# Altium PCB PCB1.PcbDoc
Units mm, origin at the board's own origin, x right, y up, seen from the top; angles counter-clockwise.
Board outline 35 x 35 mm, 4 copper layers (L1(SIGNAL), L2(GND), L3(GND), L4(SIGNAL)), stack 1.569 mm thick; 35 components, 27 nets, 172 pads, 119 vias.
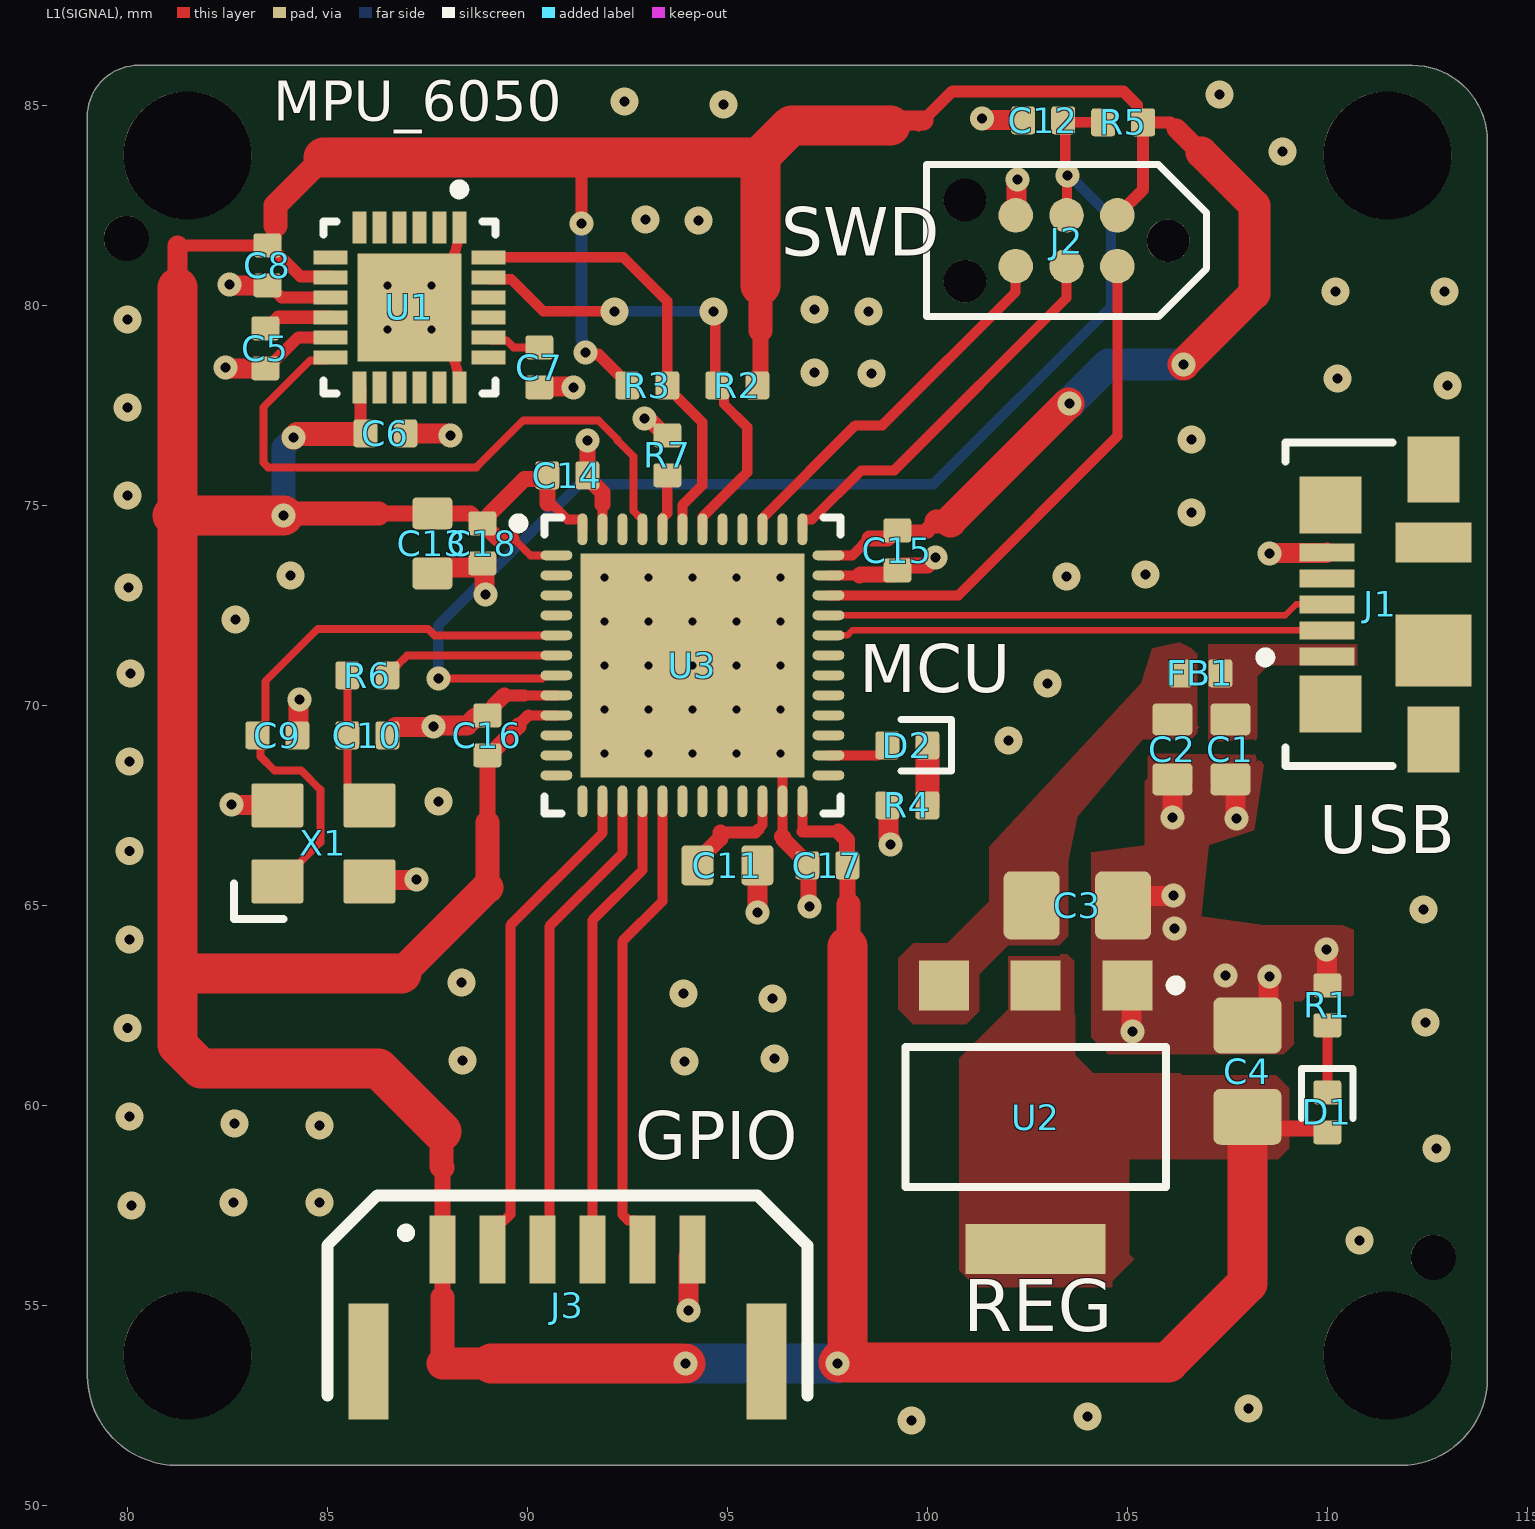
[diagram p0: L1(SIGNAL) view]
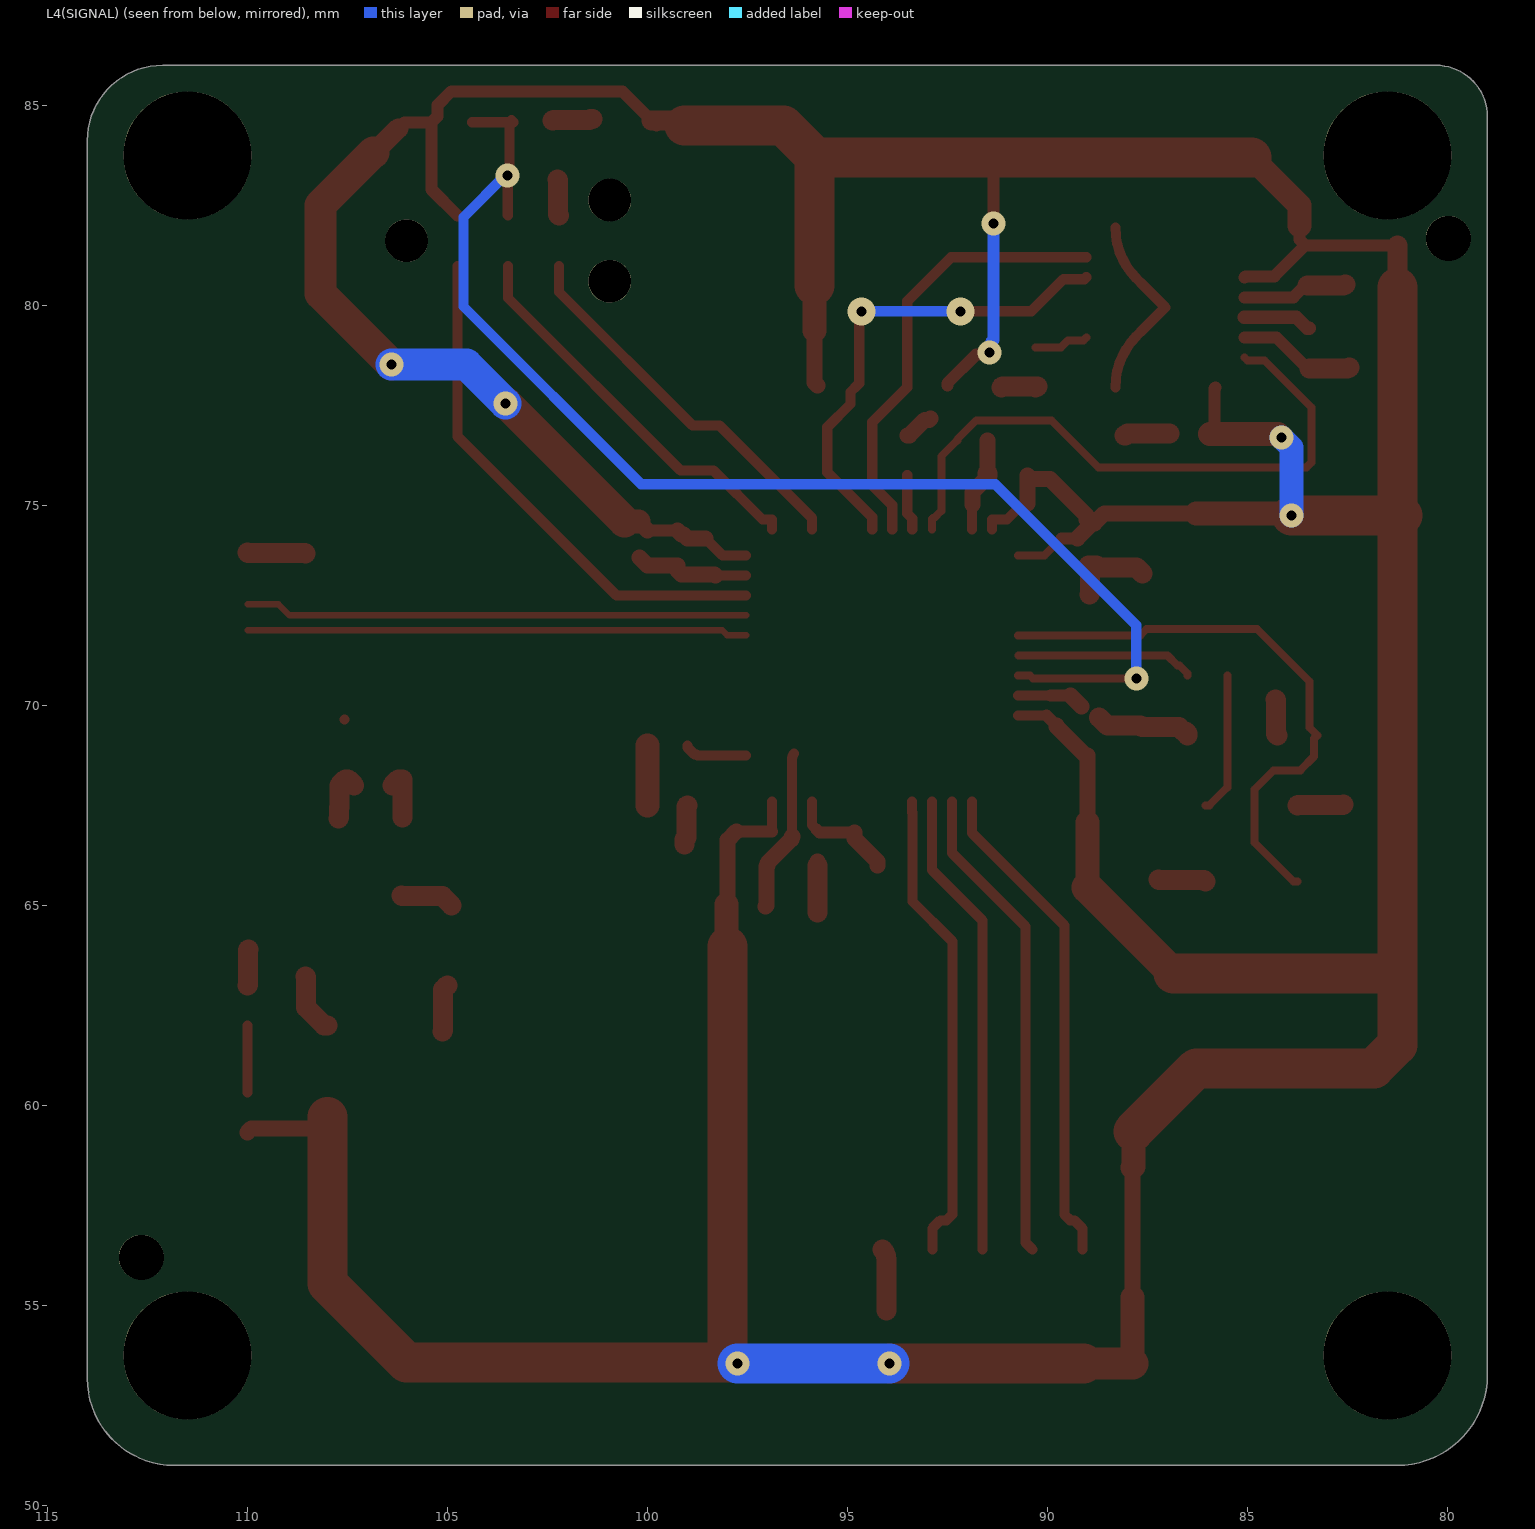
[diagram p1: L4(SIGNAL) view, seen from below]
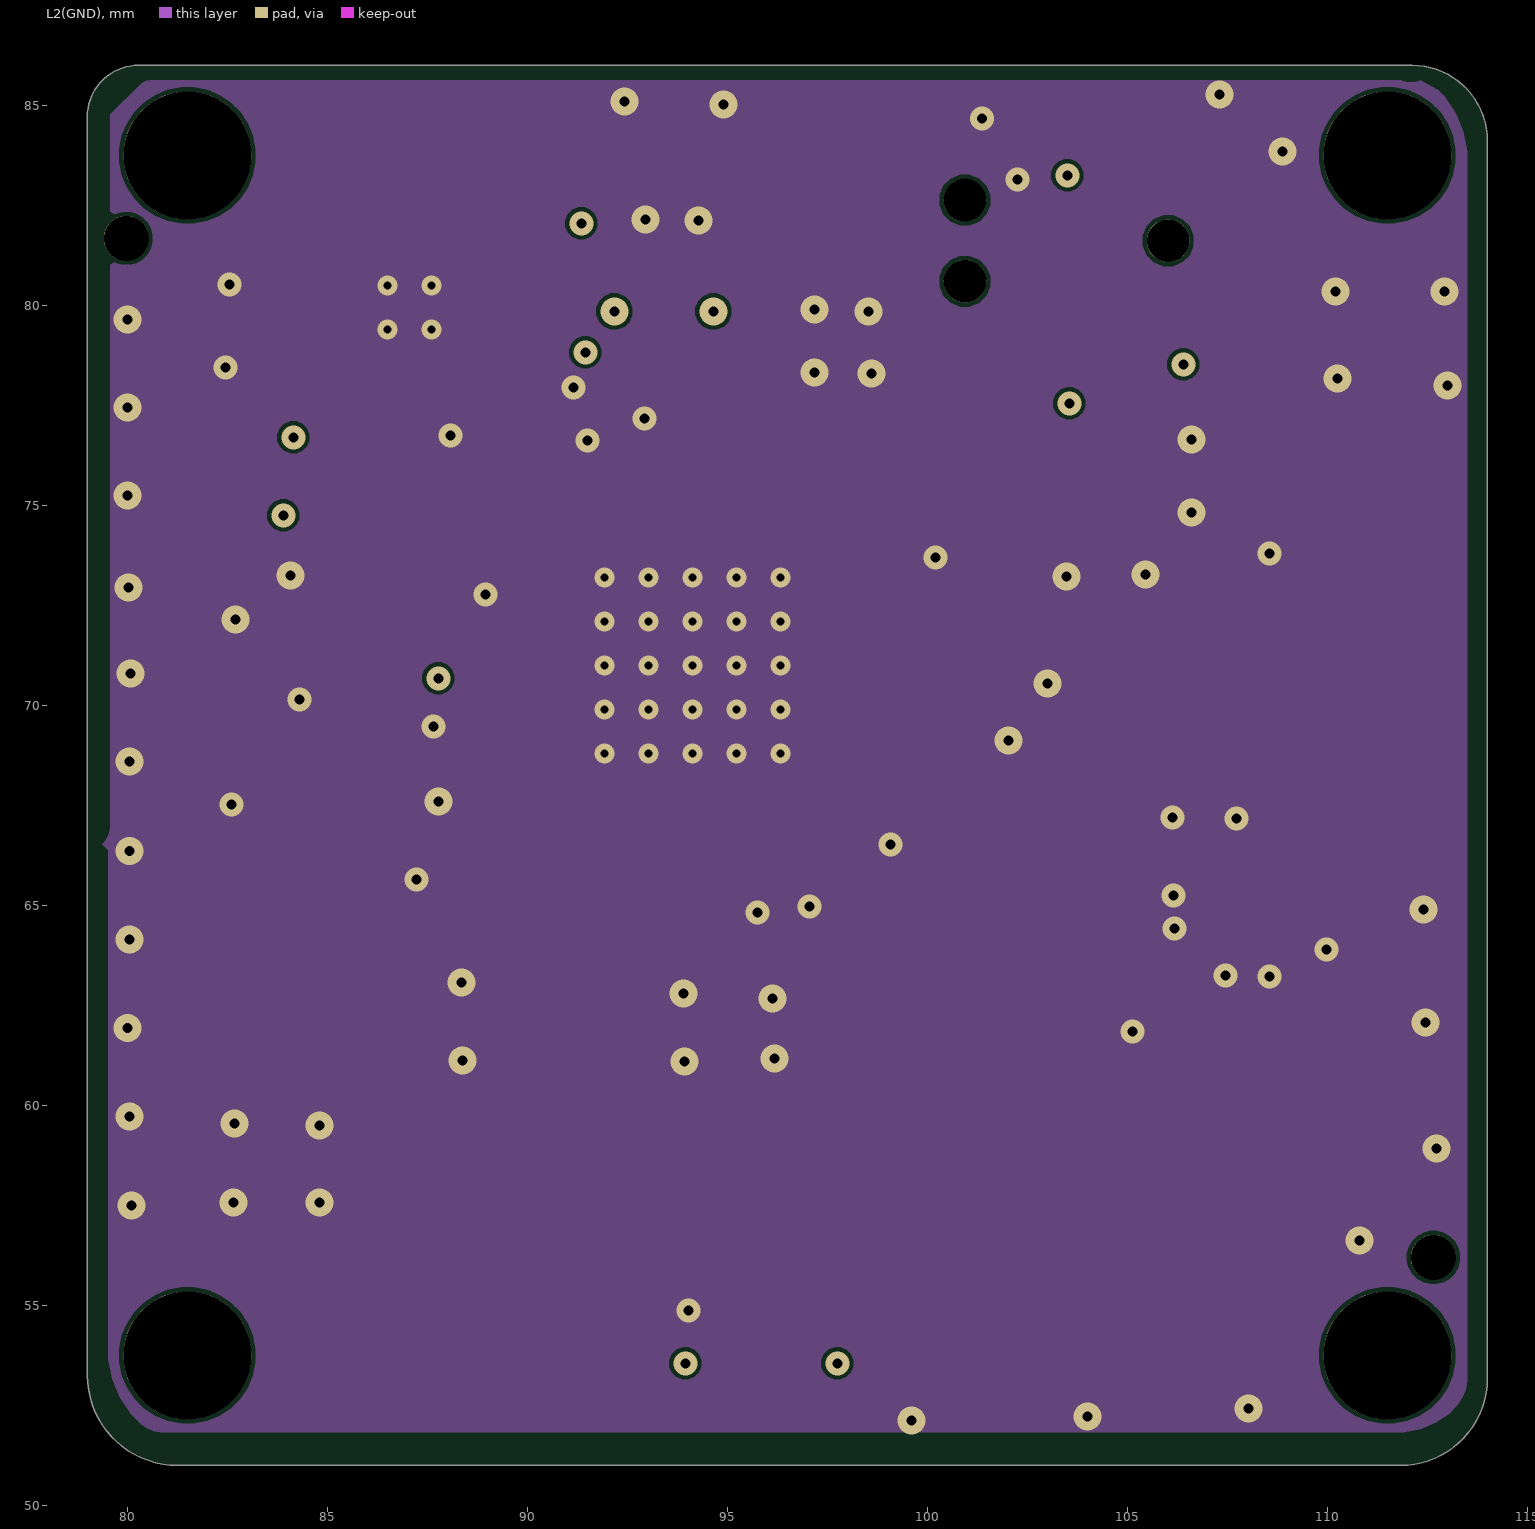
[diagram p2: L2(GND)]
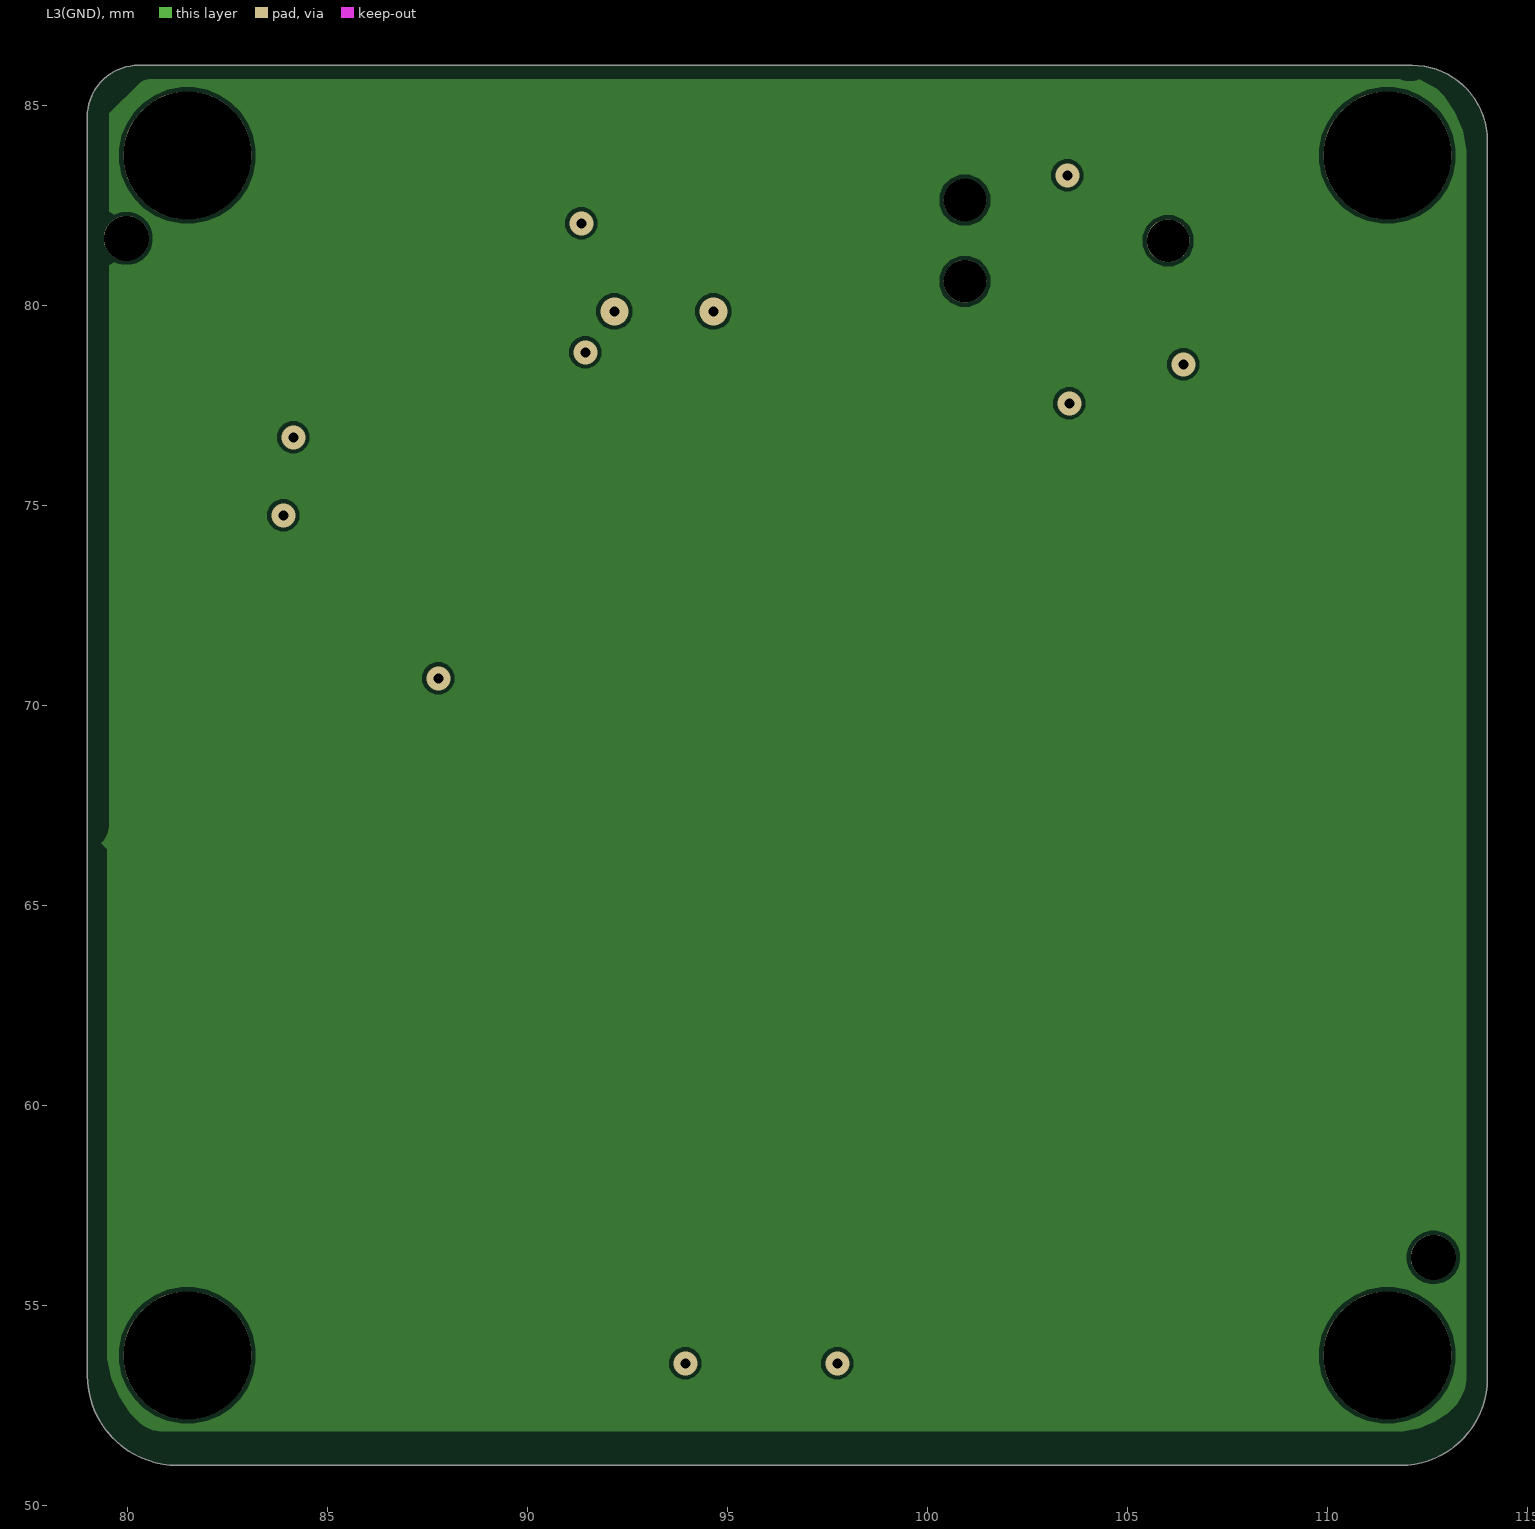
[diagram p3: L3(GND)]
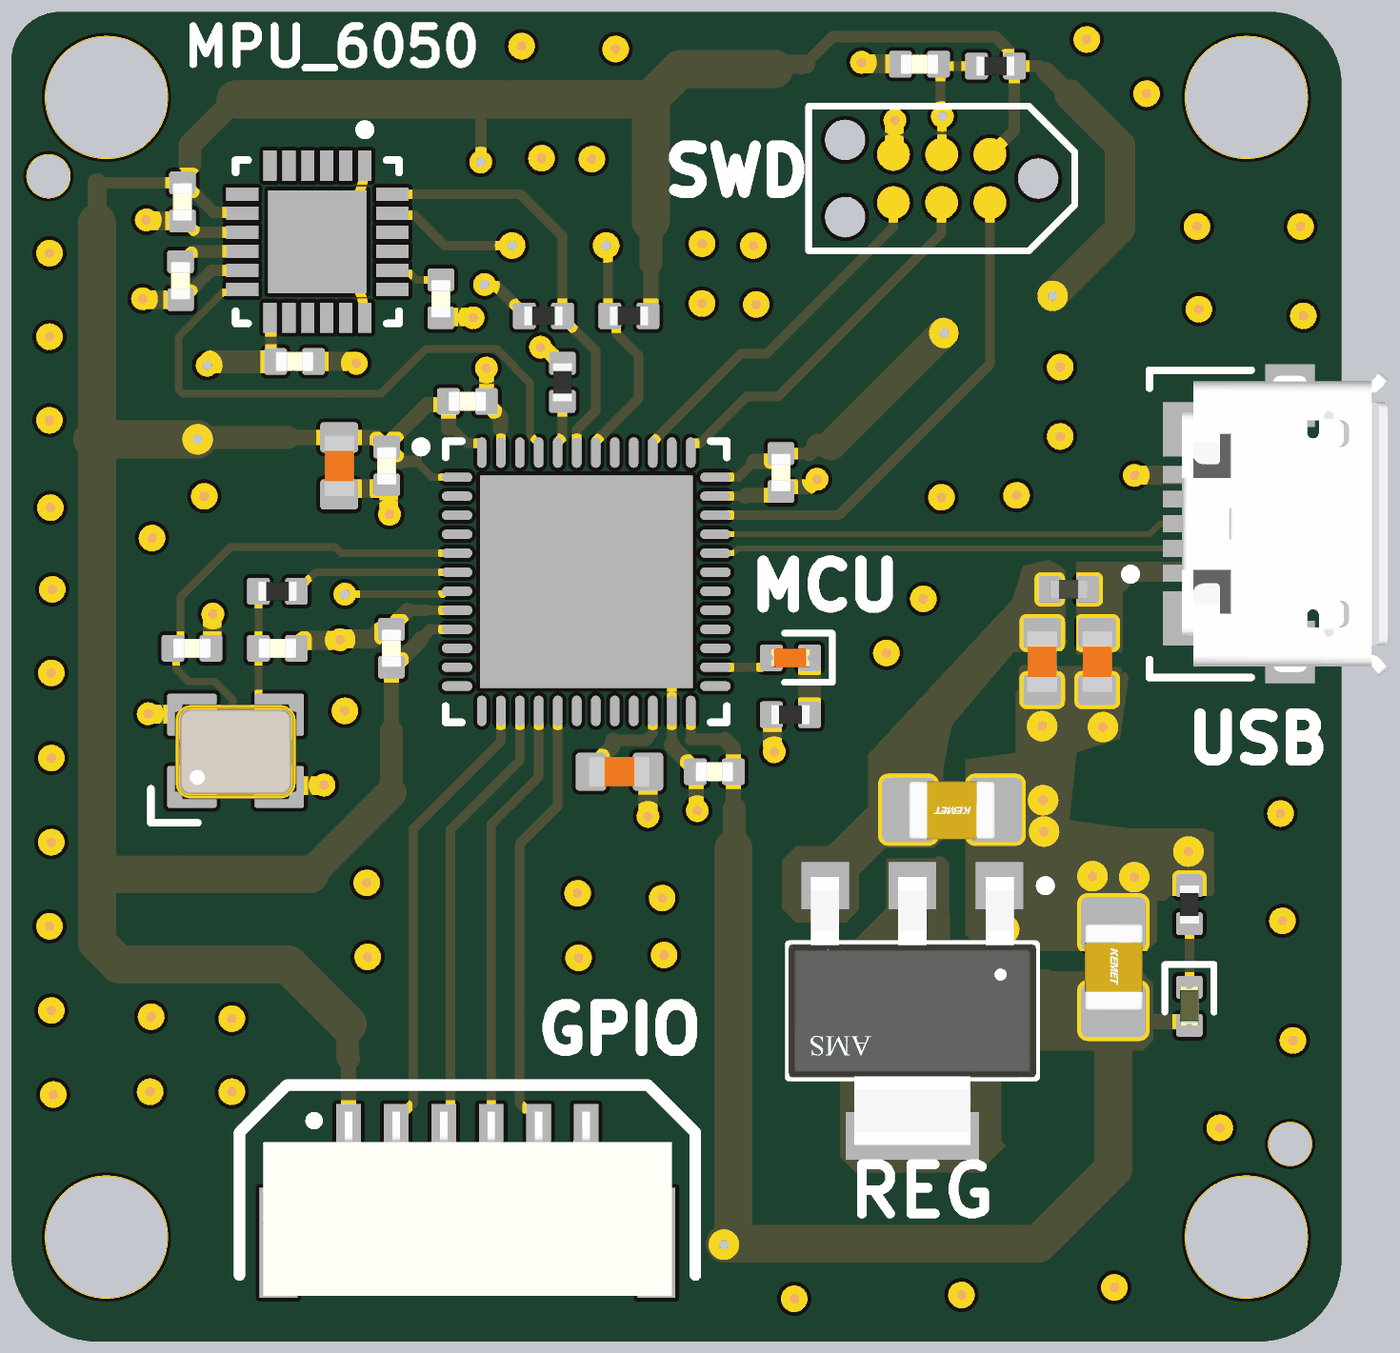
[diagram p4: 3D render of the assembled board from above, using the file's embedded part models]

## Layer stack, top to bottom
Top Solder: solder mask 0.0254, SM-001, Dk 4
L1(SIGNAL): signal copper 0.035
Dielectric 2: prepreg 0.0994, PP-017, Dk 4.1
L2(GND): signal copper 0.0175
Dielectric 3: core 1.265, Core-039, Dk 4.43
L3(GND): signal copper 0.0175
Dielectric 4: prepreg 0.0994, PP-017, Dk 4.1
L4(SIGNAL): signal copper 0.035
Bottom Solder: solder mask 0.0254, SM-001, Dk 4

## Board outline
79,53.254 79,84.72 cw(c80.28,84.72) 80.28,86 86,86 112.118,86 cw(c112.118,84.118) 114,84.118 114,53.172 cw(c111.828,53.172) 111.828,51 81.254,51 cw(c81.254,53.254)

## Design rules (kind name [scope] priority, off if disabled: settings)
Clearance [All] p1: gap=0.1 ignorepadtopadclearanceinfootprint=FALSE
DiffPairsRouting [All] p1: maxlimit=0.254 minlimit=0.203 mostfreqgap=0.254 toplayer_maxgap=0.203 toplayer_prefgap=0.203 toplayer_minwidth=0.155 toplayer_maxwidth=0.155 toplayer_prefwidth=0.155 bottomlayer_maxgap=0.203 bottomlayer_prefgap=0.203 bottomlayer_minwidth=0.155 bottomlayer_maxwidth=0.155 bottomlayer_prefwidth=0.155 impedanceprofiledriven=TRUE impedanceprofileid={55386CC8-576F-4F0E-87A2-DED9AC9837A6} impedanceprofilevalue=90.000000 maxuncoupledlength=12.7
PolygonConnect [All] p1: connectstyle=Direct reliefconductorwidth=0.254 reliefentries=4 polygonreliefangle="90 Angle" airgapwidth=0.254
RoutingVias [All] p1: holewidth=0.3 width=0.7 viastyle="Through Hole" minholewidth=0.25 minwidth=0.55 maxholewidth=0.4 maxwidth=0.9
SolderMaskExpansion [All] p1: expansion=0.102 istentingtop=FALSE
UnRoutedNet [All] p1: checkbadconnections=TRUE
Width [All] p1: maxlimit=1 minlimit=0.2 preferedwidth=0.3 midlayer1_minwidth=0.254 midlayer1_maxwidth=0.254 midlayer1_prefwidth=0.254 midlayer2_minwidth=0.254 midlayer2_maxwidth=0.254 midlayer2_prefwidth=0.254 minimp=50.000000 maximp=50.000000 favimp=50.000000
28 further rules are at their usual default settings.

## Classes and differential pairs
differential pair class DEF_USB: USB_D
differential pair USB_D: +USB_D_P -USB_D_N

## Components (designator, comment, footprint, x,y, rotation, side; value= is the part's Value field where it differs from the comment)
C1 "2u2 f" CAP_0603 107.575,68.9 r90 top
C2 "2u2 f" CAP_0603 106.125,68.9 r90 top
C3 "22 uf" CAP_0805 103.75,65 r180 top
C4 "22 uf" CAP_0805 108,60.857 r270 top
C5 "0.1 uf" CAP_0402 83.45,78.925 r270 top
C6 "0.1 uf" CAP_0402 86.45,76.8 r0 top
C7 "2n2 f" CAP_0402 90.3,78.45 r90 top
C8 "0.1 uf" CAP_0402 83.5,81 r90 top
C9 "10 pf" CAP_0402 83.75,69.25 r180 top
C10 "10 Pf" CAP_0402 86,69.25 r180 top
C11 "2u2 f" CAP_0603 95,66 r180 top
C12 "100 nf" CAP_0402 102.897,84.625 r0 top
C13 "2u2 f" CAP_0603 87.625,74.05 r90 top
C14 "100 nf" CAP_0402 91,75.75 r180 top
C15 "100 nf" CAP_0402 99.25,73.875 r90 top
C16 "100 nf" CAP_0402 89,69.25 r270 top
C17 "100 nf" CAP_0402 97.5,66 r0 top
C18 "100 nf" CAP_0402 88.875,74.05 r90 top
D1 "GREEN" LED_0402_GREEN 110,59.825 r90 top
D2 "RED" LED_0402_RED 99.5,69 r0 top
FB1 "120R" FB_0402 106.825,70.8 r180 top
J1 "473460001" FP-473460001-MFG 112.3,72.525 r90 top
J2 "TC2030-NL" TC2030-NL-FP 103.48,81.615 r180 top
J3 "SM06B-GHS-TB" SM06B-GHS-TB 91,55 r0 top
R1 "1K" RES_0402 110,62.5 r270 top
R2 "2K2" RES_0402 95.25,78 r0 top
R3 "2K2" RES_0402 93,78 r180 top
R4 "1K" RES_0402 99.5,67.5 r0 top
R5 "10k" RES_0402 104.897,84.575 r0 top
R6 "OR" RES_0402 86,70.75 r0 top
R7 "10k" RES_0402 93.5,76.25 r270 top
U1 "MPU-6050" IS-QFN-24_V 87.05,79.95 r270 top
U2 "AMS1117-3.3" FP-AMS1117-IPC_C 102.71,59.705 r270 top
U3 "STM32F411CEU6" STM-UFQFPN48_L 94.127,71.001 r0 top
X1 "24MHz" XTAL_3225 84.9,66.55 r0 top

## Footprints (in the part's own frame and the unit in brackets; to place one, negate y for a bottom-side part, rotate by r counter-clockwise, add the part's x,y. Pads: shape width x height; smd on the part's side, far side on the other; paste and mask are expansions set on the pad)
CAP_0402 [mm]
  rrect25% 0.6x0.7 smd: 1(-0.5,0) 2(0.5,0)
  body extent -0.5,-0.26 0.5,0.26, height 0.37
CAP_0603 [mm]
  rrect25% 0.8x1 smd: 1(-0.75,0) 2(0.75,0)
  body extent -0.8,-0.4 0.8,0.4, height 0.51
CAP_0805 [mm]
  rrect25% 1.4x1.7 smd: 1(-1.143,0) 2(1.143,0)
  body extent -1.15,-0.76 1.15,0.79, height 1.01
FB_0402 [mm]
  rrect25% 0.6x0.7 smd: 1(-0.5,0) 2(0.5,0)
  body extent -0.5,-0.25 0.5,0.25, height 0.51
FP-473460001-MFG [mm]
  rect 0.45x1.38 smd paste+0 mask+0: 1(-1.3,2.31) 2(-0.65,2.31) 3(0,2.31) 4(0.65,2.31) 5(1.3,2.31)
  rect 1.425x1.55 smd paste+0 mask+0: 6(-2.488,2.225) 7(2.488,2.225)
  rect 1.65x1.3 smd paste+0 mask+0: 8(-3.375,-0.35) 11(3.375,-0.35)
  rect 1.8x1.9 smd paste+0 mask+0: 9(-1.15,-0.35)
  rect 1x1.9 smd paste+0 mask+0: 10(1.55,-0.35)
  silkscreen extent -4.05,0.67 4.05,3.97, body extent -4.3,-2.48 4.3,3.45, height 0.25
FP-AMS1117-IPC_C [mm]
  rect 1.25x1.25 smd paste+0 mask+0: 1(-3.295,2.29) 2(-3.295,0) 3(-3.295,-2.29)
  rect 1.25x3.5 smd paste+0 mask+0: 4(3.295,0)
  silkscreen extent -3.42,-3.25 1.75,3.63, body extent -3.9,-3.35 3.9,3.35, height 0.25
IS-QFN-24_V [mm] "QFN, 24-Leads, Body 4x4mm, Pitch 0.5mm, Thermal Pad 2.7x2.6mm"
  rect 0.8x0.35 smd: 1(-2,1.25) 2(-2,0.75) 3(-2,0.25) 4(-2,-0.25) 5(-2,-0.75) 6(-2,-1.25) 13(2,-1.25) 14(2,-0.75) 15(2,-0.25) 16(2,0.25) 17(2,0.75) 18(2,1.25)
  rect 0.35x0.85 smd mask+0.102: 7(-1.25,-1.975) 8(-0.75,-1.975) 9(-0.25,-1.975) 10(0.25,-1.975) 11(0.75,-1.975) 12(1.25,-1.975) 19(1.25,1.975) 20(0.75,1.975) 21(0.25,1.975) 22(-0.25,1.975) 23(-0.75,1.975) 24(-1.25,1.975)
  rect 2.7x2.6 smd: 25(0,0)
  silkscreen extent -3.07,-2.15 2.15,2.15, body extent -2,-2 2,2, height 0.95
LED_0402_GREEN [mm]
  rrect25% 0.6x0.7 smd: A(-0.5,0) K(0.5,0)
  silkscreen extent -0.15,-0.65 1.1,0.65, body extent -0.51,-0.25 0.51,0.25, height 0.45
LED_0402_RED [mm]
  rrect25% 0.6x0.7 smd: A(-0.5,0) K(0.5,0)
  silkscreen extent -0.15,-0.65 1.1,0.65, body extent -0.51,-0.25 0.51,0.25, height 0.45
RES_0402 [mm]
  rrect25% 0.6x0.7 smd: 1(-0.5,0) 2(0.5,0)
  body extent -0.5,-0.25 0.5,0.25, height 0.3
SM06B-GHS-TB [mm]
  rect 0.65x1.7 smd: 1(-3.125,1.4) 2(-1.875,1.4) 3(-0.625,1.4) 4(0.625,1.4) 5(1.875,1.4) 6(3.125,1.4)
  rect 1x2.9 smd: ""(-4.975,-1.4) ""(4.975,-1.4)
  silkscreen extent -6,-2.25 6,2.75, body extent -5.38,-2.8 5.38,2.05, height 4.26
STM-UFQFPN48_L [mm] "QFN, 48-Leads, Body 7.1x7.1mm, Pitch 0.5mm, Thermal Pad 5.6x5.6mm, IPC High Density"
  oval 0.8x0.25 smd: 1(-3.4,2.75) 2(-3.4,2.25) 3(-3.4,1.75) 4(-3.4,1.25) 5(-3.4,0.75) 6(-3.4,0.25) 7(-3.4,-0.25) 8(-3.4,-0.75) 9(-3.4,-1.25) 10(-3.4,-1.75) 11(-3.4,-2.25) 12(-3.4,-2.75) 25(3.4,-2.75) 26(3.4,-2.25) 27(3.4,-1.75) 28(3.4,-1.25) 29(3.4,-0.75) 30(3.4,-0.25) 31(3.4,0.25) 32(3.4,0.75) 33(3.4,1.25) 34(3.4,1.75) 35(3.4,2.25) 36(3.4,2.75)
  oval 0.25x0.8 smd: 13(-2.75,-3.4) 14(-2.25,-3.4) 15(-1.75,-3.4) 16(-1.25,-3.4) 17(-0.75,-3.4) 18(-0.25,-3.4) 19(0.25,-3.4) 20(0.75,-3.4) 21(1.25,-3.4) 22(1.75,-3.4) 23(2.25,-3.4) 24(2.75,-3.4) 37(2.75,3.4) 38(2.25,3.4) 39(1.75,3.4) 40(1.25,3.4) 41(0.75,3.4) 42(0.25,3.4) 43(-0.25,3.4) 44(-0.75,3.4) 45(-1.25,3.4) 46(-1.75,3.4) 47(-2.25,3.4) 48(-2.75,3.4)
  rect 5.6x5.6 smd: 49(0,0)
  silkscreen extent -4.47,-3.7 3.7,3.7, body extent -3.55,-3.55 3.55,3.55, height 0.6
TC2030-NL-FP [mil]
  round 33.98 smd paste-16.99: 1(-50,-25) 2(-50,25) 3(0,-25) 4(0,25) 5(50,-25) 6(50,25)
  round 42.01 hole 42.01 unplated: MH(-100,0) MH(100,-40) MH(100,40)
  silkscreen extent -138,-75 138,75
XTAL_3225 [mm]
  rrect10% 1.3x1.1 smd: 1(-1.15,-0.95) 2(1.15,-0.95) 3(1.15,0.95) 4(-1.15,0.95)
  silkscreen extent -2.23,-1.89 -1,-1, body extent -1.6,-1.28 1.6,1.22, height 0.61

## Part data
C1 C2 C11 C13: library part CAP_0603, "Capacitor SMD 0603"
C3 C4: library part CAP_0805, "Capacitor SMD 0805"
C5 C6 C7 C8 C9 C10 C12 C14 C15 C16 C17 C18: library part CAP_0402, "Capacitor SMD 0402"
D1: library part LED_0402_GREEN, "LED 0402 GREEN SMD"
D2: library part LED_0402_RED, "LED 0402 RED SMD"
FB1: library part FB_0402, "Ferrite Bead SMD 0402"
J1: library part CMP-2000-05246-2, "CONN RCPT USB2.0 MICRO B SMD R/A", Current Rating=1.8A, Manufacturer=Molex, Package=0, Temperature="-30°C to +85°C", Temperature Range High=+85°C, Temperature Range Low=-30°C, Voltage Rating=30V, Automotive=No, Category=Conn, ComponentLink2Description=Datasheet, ComponentLink2URL=https://www.molex.com/webdocs/datasheets/pdf/en-us/0473460001_IO_CONNECTORS.pdf, Conn Orientation="Right Angle", Contact Material=Gold,Nickel, Device Class L1=Connectors, Device Class L2="USB Connectors", Device Class L3=unset, Digikey Description="CONN RCPT USB2.0 MICRO B SMD R/A", Footprint Url=https://www.molex.com/pdm_docs/sd/473460001_sd.pdf, Height=2.945mm, Is Female=yes, Lead Free=Yes, Manufacturer Part Number=473460001, Number Of Contacts=5, Octopart=https://octopart.com/47346-0001-molex-7164928, Pitch=0.65mm, RoHS=TRUE, Shielding=true, Usb Standard="USB 2.0"
J2: "Tag-Connect No-Solder SWD Debug Connector (No Legs) DO NOT PLACE", Manufacturer=Tag-Connect, Manufacturer Part Number=TC2030-NL-FP
J3: "Header Connector 6 Position 1.25MM Pitch SMD Horizontal JST GH", Manufacturer=JST, Manufacturer Part Number=SM06B-GHS-TB
R1 R2 R3 R4 R5 R6 R7: library part RES_0402, "Resistor SMD 0402"
U1: library part CMP-1753-00002-2, "3-Axis Gyroscope, Accelerometer and a Digital Motion Processor(TM) (DMP), 2.375 to 3.46 V, -40 to 85 degC, 24-Pin QFN, RoHS, Tape and Reel", Manufacturer=InvenSense, Standard Package=5,000, Category=Sensors,Transducers, Datasheet URL=http://datasheet.octopart.com/MPU-6050-InvenSense-datasheet-14421344.pdf, Datasheet Version="Rev. 3.3, 05/2012", Dynamic Catalog=MPU-6000™Series, Family=Multifunction, Featured Product=MPU-60506-Axis,IntegratedI²CSolution, Manufacturer URL=http://www.invensense.com/, Online Catalog=MPU-6000™Series, Other Names="1428-1007-2 / MPU6050", Output Type=Digital, Sensor Type=MotionTracking, Unit PriceUSD=Digital
U2: library part CMP-209535-000001-1, "LDO Voltage Regulators 1A, 3.3V", Dropout Voltage=1.1V, Manufacturer="Advanced Monolithic Systems", Max Junction Temp=+125°C, Max Power Dissipation=1.2W, Max Supply Voltage=15V, Nominal Supply Current=5mA, Output Current=1A, Output Voltage=3.3V, Package=AMS1117, Temperature="-40°C to +125°C", Temperature Range Low=-40°C, Automotive=No, Category=IC, ComponentLink2Description=Datasheet, ComponentLink2URL=http://www.advanced-monolithic.com/pdf/ds1117.pdf, Device Class L1="Integrated Circuits (ICs)", Device Class L2="Power Management ICs", Device Class L3="Voltage Regulators - Linear", Height=1.8mm, Ipc Land Pattern Name=SOT229P700X180-4, Lead Free=Yes, Manufacturer Part Number=AMS1117-3.3, Number Of Outputs=1, Octopart=https://octopart.com/ams1117-3.3-advanced+monolithic+systems-25899300, Output Type=Fixed, RoHS=TRUE, Standoff Height=0.64mm, Temperature Range High=+125°C
U3: library part CMP-0243-00165-1, "ARM Cortex-M4 32-bit MCU+FPU, 512 KB Flash, 128 KB RAM, 36 I/Os, 48-Pin UFQFPN, -40 to 85 degC, Tray", I/Os (High Current)=36, Operating Frequency(F) (Processor speed) (MHz)=100, Package Description=UFQFPN48, Package Reference="48-Pin Ultra Thin Fine Pitch Quad Flat No-Lead, 7 x 7 x 0.6 mm Body, 0.5 mm Pitch, Exposed Pad", Supply Voltage(Vcc) min (V)=1.7, ComponentLink1Description="Manufacturer URL", ComponentLink1URL=http://www.st.com/, ComponentLink2Description=Datasheet, ComponentLink2URL=http://www.st.com/st-web-ui/static/active/en/resource/technical/document/datasheet/DM00115249.pdf, Core="ARM Cortex-M4", DatasheetVersion="Rev. 6", FLASH Size (Prog) (kB)=512, Internal RAM Size (kB)=128, Mounting Technology="Surface Mount", Packing=Tray
X1: library part TSX-3225_24.0000MF15X-AC, "Crystal SMD 24MHz 10PPM 7pF 3225", Manufacturer=Epson, Manufacturer Part Number="TSX-3225 24.0000MF15X-AC"

## Free pads (board coordinates)
  round 3.2 hole 3.2: MH(81.5,53.75) MH(81.5,83.75) MH(111.5,53.75) MH(111.5,83.75)
  round 1.125 hole 1.125: TH(79.975,81.675) TH(112.65,56.2)

## Via types
v1: diameter 0.7, hole 0.25, L1(SIGNAL) to L2(GND), 51 vias
v2: diameter 0.5, hole 0.2, L1(SIGNAL) to L2(GND), 29 vias
v3: diameter 0.6, hole 0.25, L1(SIGNAL) to L2(GND), 27 vias
v4: diameter 0.6, hole 0.25, L1(SIGNAL) to L4(SIGNAL), 10 vias
v5: diameter 0.7, hole 0.25, L1(SIGNAL) to L4(SIGNAL), 2 vias

## Nets (pads, with @x,y where several pads share a name; then routed paths per layer and width w, separated by ;. In a path a pad name is that pad's centre, name@x,y a point inside that pad or via, vN(x,y) a via of type N, cw(c..) or ccw(c..) an arc to the next point about the centre after c; other vN are vias at no path point)
3V3: C4.2 C6.1 C8.2 C13.2 C14.2 C15.2 C16.2 C17.2 C18.2 D1.A J2.1 J3.1 R2.2 R3.2 R5.2 U1.8 U1.13 U2.2 U2.4 U3.1 U3.9 U3.24 U3.36 U3.48 | length 172.1
  L1(SIGNAL) w0.2: 89.65,74.175 90.074,73.751 U3.1
  L1(SIGNAL) w0.25: 90.025,69.75 90.026,69.751 U3.9 ; 90.5,75.047 90.603,75.047 91.008,74.642 91.377,74.642 U3.48 ; 96.877,66.85 U3.24 ; U3.36 98.126,73.751 98.55,74.175
  L1(SIGNAL) w0.3: 81.25,81.5 C8.2 C8.2@83.55,81.5 ; 83.7,82 83.7,81.65 C8.2@83.55,81.5 ; U1.8 85.05,80.725 84.325,80.725 C8.2@83.55,81.5 ; U1.13 85.825,77.925 C6.1@85.825,76.925 ; 89.25,74.175 89.65,74.175 ; 89.775,69.5 90.025,69.75 ; v4(91.35,82.05) 91.35,83.4 91.65,83.7 ; v4(91.45,78.825) 91.507,78.768 91.782,78.768 92.5,78.05 R3.2 ; 96.877,66.85 97.775,66.85 ; C15.2 100,74.375 ; 99.775,84.5 99.9,84.625 100.625,85.35 104.9,85.35 105.247,85.003 105.247,84.725 R5.2 ; J2.1 105.397,82.897 R5.2 ; 106.225,84.425 106.075,84.575 R5.2
  L1(SIGNAL) w0.4: 81.125,76.975 81.4,77.25 ; 86.275,74.8 C13.2 88.575,74.8 C18.2@88.825,74.55 ; 87.875,55.2 J3.1 87.875,58.45 ; 89,67.075 C16.2 89.05,68.75 89.775,69.475 89.775,69.5 ; 89.25,74.175 C18.2 C18.2@88.825,74.55 ; 90.5,75.047 C14.2 90.41,75.66 89.935,75.66 89.025,74.75 89.025,74.65 88.925,74.55 C18.2@88.825,74.55 ; R2.2 95.825,78.075 95.825,79.375 ; 97.775,66.85 97.995,66.63 97.995,66.005 C17.2 98,65.05 98.025,65.025 ; 98.55,74.175 99,74.175 99.1,74.275 99.15,74.275 C15.2 ; 100,74.375 100.225,74.6 ; C4.2 108.289,59.425 109.9,59.425 D1.A
  L1(SIGNAL) w0.5: 81.25,80.45 81.25,81.5 ; 99.075,84.5 99.2,84.625 99.9,84.625 ; 106.225,84.425 106.825,83.825 106.85,83.825
  L1(SIGNAL) w0.6: 83.7,82 83.7,82.5 84.9,83.7 ; v4(83.9,74.75) 83.95,74.8 86.275,74.8 ; v4(84.15,76.7) 84.237,76.787 C6.1@85.937,76.787 ; 87.85,59.35 87.85,58.475 87.875,58.45 ; 87.875,53.55 87.875,55.2 ; 89,65.45 89,67.075 ; 95.825,79.375 95.825,80.5 ; 98,63.975 98.025,64 98.025,65.025 ; 100.225,74.6 100.575,74.6
  L1(SIGNAL) w0.8: 86.85,63.3 89,65.45 ; 87.875,53.55 89.1,53.55 ; 100.575,74.6 v4@103.525,77.55 ; v4(106.4,78.525) 108.175,80.3 108.175,82.5 106.85,83.825
  L1(SIGNAL) w1: 81.125,74.75 v4(83.9,74.75) ; 81.25,80.45 81.25,76.975 81.25,74.75 81.25,63.3 ; 84.9,83.7 91.65,83.7 95.8,83.7 ; 86.85,63.3 81.25,63.3 ; 87.85,59.35 86.275,60.925 81.836,60.925 81.25,61.511 81.25,63.3 ; 89.1,53.55 v4(93.95,53.55) ; 95.825,80.5 95.825,83.675 95.8,83.7 ; 98,63.975 98,53.8 97.775,53.575 106.025,53.575 108,55.55 C4.2 ; 99.075,84.5 96.6,84.5 95.8,83.7
  L4(SIGNAL) w0.3: v4(91.35,82.05) 91.35,79.137 91.393,79.095 91.393,78.882 v4(91.45,78.825)
  L4(SIGNAL) w0.6: v4(83.9,74.75) 83.9,76.45 v4(84.15,76.7)
  L4(SIGNAL) w0.8: v4(103.55,77.55) 104.525,78.525 v4(106.4,78.525)
  L4(SIGNAL) w1: v4(93.95,53.55) v4(97.75,53.55)
+5V: C2.2 C3.2 FB1.2 U2.3
GND: C1.1 C2.1 C3.1 C4.1 C5.2 C6.2 C7.1 C8.1 C9.1 C10.1 C11.1 C12.1 C13.1 C14.1 C15.1 C16.1 C17.1 C18.1 J1.5 J2.5 J3.6 R1.1 R4.1 R7.1 U1.1 U1.9 U1.11 U1.18 U1.25 U2.1 U3.8 U3.23 U3.35 U3.47 U3.49 X1.2 X1.4 | length 47.2
  L1(SIGNAL) w0.25: U1.18 ccw(c86.489,77.95) 87.77,79.23 v2(87.6,79.4) U1.25 v2(87.6,80.5) 87.77,80.67 ccw(c86.489,81.95) U1.1 ; 89.925,70.25 89.926,70.251 U3.8 ; 91.875,75.025 91.877,75.023 U3.47 ; v2(96.327,68.801) cw(c96.206,68.68) 96.377,68.68 U3.23 96.377,66.723 96.4,66.7 ; U3.35 98.299,73.251 98.3,73.25
  L1(SIGNAL) w0.3: C5.2 83.5,78.425 84.275,79.2 U1.11 ; C8.1 83.55,80.5 83.85,80.2 U1.9 ; 89.425,70.25 89.925,70.25
  L1(SIGNAL) w0.4: C16.1@89.15,69.975 89.425,70.25 ; C14.1 91.5,75.7 91.875,75.325 91.875,75.025 ; C14.1@91.5,75.8 v3(91.5,76.625) ; v3(92.925,77.175) 92.963,77.137 93.063,77.137 93.45,76.75 R7.1 ; C11.1 C11.1@95.75,66.1 ; 96.373,66.723 96.377,66.723 ; 96.4,66.7 96.4,66.65 97,66.05 C17.1 97.025,65.975 97.025,65 v3(97.05,64.975) ; 98.3,73.25 98.325,73.275 99.15,73.275 C15.1 99.25,73.5 100,73.5 v3(100.2,73.7)
  L1(SIGNAL) w0.5: v3(82.45,78.45) ccw(c82.51,78.51) 82.51,78.425 C5.2 ; v3(82.55,80.525) ccw(c82.61,80.585) 82.61,80.5 C8.1 ; v3(82.6,67.525) 82.612,67.513 83.738,67.513 X1.4 ; C9.1 84.281,69.281 84.281,70.131 v3(84.3,70.15) ; X1.2 86.081,65.631 87.206,65.631 v3(87.225,65.65) ; C10.1 86.5,69.3 86.55,69.35 86.6,69.35 86.706,69.456 87.631,69.456 87.669,69.494 88.501,69.494 C16.1@88.707,69.7 ; C6.2 87.998,76.8 88.048,76.75 v3(88.075,76.75) ; C13.1 87.775,73.45 C18.1@88.775,73.45 ; C18.1@88.775,73.5 88.975,73.5 88.931,73.5 88.931,72.794 v3(88.95,72.775) ; C7.1 cw(c90.3,78.01) 90.257,77.968 90.25,77.975 91.125,77.975 v3(91.15,77.95) ; C14.1 C14.1@91.5,75.8 ; v3(94.025,54.875) 94.025,56.159 cw(c94.366,56.159) J3.6 ; v3(95.75,64.825) C11.1 ; R4.1 99.025,67.475 99.025,66.7 99.075,66.65 v3(99.075,66.525) ; v3@101.372,84.653 101.375,84.656 101.418,84.656 101.443,84.631 102.347,84.631 102.353,84.625 C12.1@102.375,84.625 ; J2.5 102.231,82.271 102.231,83.131 v3(102.25,83.15) ; C3.1 105.124,65.231 106.131,65.231 v3(106.15,65.25) ; U2.1 105.106,62.894 105.106,61.869 v3(105.125,61.85) ; v3(106.125,67.2) C2.1 106.225,68.15 C2.1@106.375,68 ; C1.1@107.33,68 107.48,68.15 107.55,68.15 107.7,68 107.7,67.45 107.706,67.444 107.706,67.194 v3(107.725,67.175) ; C4.1 108.081,62 108.531,62.45 108.531,63.206 v3(108.55,63.225) ; v3(108.55,73.8) 108.562,73.812 109.977,73.812 J1.5 ; v3(109.975,63.9) 109.987,63.887 109.987,63.013 R1.1
  other v1: 99.6,52.125 104,52.225 108.025,52.425 110.8,56.625 80.1,57.5 82.65,57.575 84.8,57.575 112.725,58.925 84.8,59.5 82.675,59.55 80.05,59.715 88.375,61.125 93.925,61.1 96.175,61.175 80,61.93 112.45,62.075 96.125,62.675 93.9,62.8 88.35,63.075 80.05,64.145 112.4,64.9 80.05,66.36 87.775,67.6 80.05,68.6 102.025,69.125 103,70.55 80.075,70.8 82.7,72.15 80.025,72.95 103.475,73.225 84.075,73.25 105.45,73.275 106.6,74.825 80,75.25 106.6,76.65 80,77.45 113,78 110.25,78.175 98.6,78.3 97.175,78.325 80,79.65 98.525,79.85 97.175,79.9 110.2,80.35 112.925,80.35 94.275,82.125 92.95,82.15 108.875,83.85 94.9,85.025 92.425,85.1 107.3,85.275
  other v2: 91.927,68.801 93.027,68.801 94.127,68.801 95.227,68.801 91.927,69.901 93.027,69.901 94.127,69.901 95.227,69.901 96.327,69.901 91.927,71.001 93.027,71.001 94.127,71.001 95.227,71.001 96.327,71.001 91.927,72.101 93.027,72.101 94.127,72.101 95.227,72.101 96.327,72.101 91.927,73.201 93.027,73.201 94.127,73.201 95.227,73.201 96.327,73.201 86.5,79.4 86.5,80.5
  other v3: 107.45,63.25 106.175,64.425 87.65,69.475 101.372,84.675
"IMU CPOUT": C7.2 U1.20 | length 1.4
  L1(SIGNAL) w0.2: U1.20 89.1,79.125 89.483,79.125 89.658,78.95 C7.2
"IMU LED A": D2.A U3.26 | length 1.6
  L1(SIGNAL) w0.25: U3.26 98.751,68.751 98.775,68.775 98.825,68.775 99,68.95 D2.A
"IMU REGOUT": C5.1 U1.10 | length 1.7
  L1(SIGNAL) w0.33: C5.1 83.5,79.425 83.775,79.7 U1.10
IMU_INT: U1.12 U3.45 | length 15.7
  L1(SIGNAL) w0.2: U1.12 85,78.625 84.575,78.625 83.4,77.45 83.4,76.067 83.517,75.95 88.725,75.95 89.9,77.125 91.775,77.125 92.25,76.65 92.25,76.625 92.65,76.225 92.65,74.863 92.827,74.686 92.854,74.686 92.877,74.662 U3.45
IMU_SCL: R2.1 U1.23 U3.42 | length 12.2
  L1(SIGNAL) w0.254: U1.23 89.073,80.652 89.598,80.652 90.4,79.85 v5(92.175,79.85) ; U3.42 94.377,74.702 95.5,75.825 95.5,76.95 94.918,77.532 94.918,77.832 R2.1 94.7,78.05 94.7,79.8 v5(94.65,79.85)
  L4(SIGNAL) w0.254: v5(92.175,79.85) v5(94.65,79.85)
IMU_SDA: R3.1 U1.24 U3.43 | length 11.2
  L1(SIGNAL) w0.254: U1.24 92.4,81.2 93.5,80.1 R3.1 93.5,77.95 94.375,77.075 94.375,75.5 93.877,75.002 U3.43
LED_POWER_K: D1.K R1.2 | length 1.7
  L1(SIGNAL) w0.25: D1.K R1.2
"MCU BOOT0": R7.2 U3.44 | length 1.4
  L1(SIGNAL) w0.254: U3.44 93.377,74.672 93.5,74.795 R7.2
"MCU NRST": C12.2 J2.3 R5.1 U3.7 | length 31.6
  L1(SIGNAL) w0.2: v4(87.775,70.675) 90.362,70.675 90.438,70.751 U3.7
  L1(SIGNAL) w0.254: C12.2@103.35,84.578 C12.2 C12.2@103.447,84.575 ; J2.3 103.49,82.26 103.49,83.24 v4(103.5,83.25) 103.449,83.301 103.449,84.574 C12.2@103.447,84.575 ; R5.1@104.375,84.575 C12.2@103.447,84.575
  L4(SIGNAL) w0.254: v4(87.775,70.675) 87.775,72 91.3,75.525 100.15,75.525 104.595,79.97 104.595,82.205 103.55,83.25 v4(103.5,83.25)
"MCU OSC IN": C9.2 U3.5 X1.1 | length 14.5
  L1(SIGNAL) w0.2: X1.1 83.85,65.6 84.825,66.575 84.825,67.891 84.341,68.375 83.675,68.375 83.333,68.717 83.333,69.167 C9.2 83.45,69.45 83.45,70.6 84.762,71.912 87.515,71.912 87.676,71.751 U3.5
"MCU OSC OUT": R6.2 U3.6 | length 4.5
  L1(SIGNAL) w0.2: R6.2 86.5,70.8 86.7,71 86.75,71 86.997,71.247 U3.6@90.723,71.247
"MCU PA4": J3.2 U3.14 | length 12.4
  L1(SIGNAL) w0.25: J3.2 89.125,56.925 89.325,57.125 89.429,57.125 89.575,57.271 89.575,64.5 91.877,66.802 U3.14
"MCU PA5": J3.3 U3.15 | length 12
  L1(SIGNAL) w0.25: J3.3 90.55,56.575 90.55,64.475 92.377,66.302 U3.15
"MCU PA6": J3.4 U3.16 | length 11.7
  L1(SIGNAL) w0.25: J3.4 91.625,64.625 92.877,65.877 U3.16
"MCU PA7": J3.5 U3.17 | length 11.9
  L1(SIGNAL) w0.25: J3.5 92.875,56.925 92.675,57.125 92.521,57.125 92.375,57.271 92.375,64.1 93.373,65.098 93.373,67.322 93.377,67.326 U3.17
"MCU SWCLK": J2.4 U3.37 | length 9.9
  L1(SIGNAL) w0.25: U3.37 96.877,74.642 97.118,74.642 98.351,75.875 99.175,75.875 103.48,80.18 J2.4
"MCU SWDIO": J2.2 U3.34 | length 13.1
  L1(SIGNAL) w0.25: U3.34 100.776,72.751 104.75,76.725 J2.2
"MCU SWO": J2.6 U3.39 | length 9.6
  L1(SIGNAL) w0.25: U3.39 95.877,74.677 98.2,77 98.875,77 102.21,80.335 J2.6
"MCU VCAP1": C11.2 U3.22 | length 2.8
  L1(SIGNAL) w0.25: 95.775,66.9 95.877,67.002 U3.22
  L1(SIGNAL) w0.3: 94.825,66.825 95.7,66.825 95.775,66.9
  L1(SIGNAL) w0.4: C11.2 94.25,66.1 94.825,66.675 94.825,66.825
NetD2_K: D2.K R4.2 | length 1.5
  L1(SIGNAL) w0.6: R4.2 D2.K
USB_D_N: J1.2 U3.32 | length 12.5
  L1(SIGNAL) w0.155: U3.32 98.005,71.751 98.129,71.875 J1.2
USB_D_P: J1.3 U3.33 | length 12.6
  L1(SIGNAL) w0.155: U3.33 108.948,72.251 109.222,72.525 J1.3
VBUS: C1.2 FB1.1 J1.1 | length 0
"XTAL IN": C10.2 R6.1 X1.3 | length 3.5
  L1(SIGNAL) w0.2: R6.1 85.5,67.95 85.95,67.5 X1.3
pads on no net: J1.4 J1.6 J1.7 J1.8 J1.9 J1.10 J1.11 J2.MH J3. U1.2 U1.3 U1.4 U1.5 U1.6 U1.7 U1.14 U1.15 U1.16 U1.17 U1.19 U1.21 U1.22 U3.2 U3.3 U3.4 U3.10 U3.11 U3.12 U3.13 U3.18 U3.19 U3.20 U3.21 U3.25 U3.27 U3.28 U3.29 U3.30 U3.31 U3.38 U3.40 U3.41 U3.46

## Polygon pours and split planes (outlines as drawn)
GND on L1(SIGNAL) "GND_L01_P012" (solid, pour order 12): 108.356,68.756 105.431,68.806 105.506,68.881 105.506,68.181 105.431,68.106 105.431,66.501 104.1,66.321 104.1,61.707 104.518,61.281 108.906,61.281 109.181,61.556 109.156,61.581 109.156,62.606 109.356,62.606 109.506,62.756 109.531,62.731 110.606,62.731 110.656,62.781 110.656,64.393 110.381,64.506 110.181,64.506 108.906,64.506 108.581,64.506 108.431,64.506 106.843,64.725 107.035,66.501 108.175,66.874 108.431,68.681 108.175,68.575
3V3 on L1(SIGNAL) "3V3_L01_P007" (solid, pour order 7): 103.325,63.725 102.025,63.725 102.025,62.4 100.8,61.175 100.8,55.875 101.225,55.45 104.625,55.45 104.625,55.6 105.175,56.15 105.05,56.275 105.05,58.65 108.775,58.65 109.05,58.925 109.05,60.425 108.725,60.75 106.375,60.75 106.325,60.8 104.15,60.8 103.7,61.25 103.7,62.25 103.675,62.275 103.675,63.6 103.5,63.775 103.325,63.775 103.325,63.725 103.35,63.7
+5V on L1(SIGNAL) "+5V_L01_P006" (solid, remove dead copper, pour order 6): 105.348,70.548 101.55,66.462 101.55,65.1 100.5,64.05 99.65,64.05 99.275,63.675 99.275,62.4 99.65,62.025 100.975,62.025 101.3,62.35 101.3,63.275 102.025,64 103.3,64 103.525,64.225 103.525,65.95 103.525,66.1 103.748,67.216 105.384,69.15 106.225,69.15 106.25,69.175 106.625,69.175 106.75,69.3 106.75,69.4 106.8,69.45 106.75,69.5 106.75,71.3 106.725,71.3 106.6,71.425 106.302,71.574 105.625,71.425
VBUS on L1(SIGNAL) "VBUS_L01_P005" (solid, pour order 5): 108.25,69.075 108.175,69.15 107.025,69.081 107.025,71.525 110.75,71.525 110.75,71.025 110.775,71 108.525,71 108.25,70.725 108.25,69.225 108.175,69 108.1,69.075
GND on L3(GND) "GND_L03_P010" (solid, pour order 10): 79.504,66.4 79.504,53.927 ccw(c82.044,53.927) 80.248,52.131 80.279,52.1 ccw(c80.882,52.704) 80.882,51.85 111.705,51.85 ccw(c111.705,53.899) 113.154,52.45 ccw(c112.369,53.235) 113.479,53.235 113.479,83.623 ccw(c110.939,83.623) 112.735,85.419 112.304,85.65 cw(c112.063,86.233) 111.821,85.65 80.579,85.65 ccw(c80.579,85.228) 80.28,85.526 79.554,84.8 79.554,67.033 cw(c78.871,67.033) 79.354,66.55
GND on L3(GND) "GND_L03_P009" (solid, pour order 9): 90.7,143.5 90.7,131.027 ccw(c93.24,131.027) 91.444,129.231 91.475,129.2 ccw(c92.079,129.804) 92.079,128.95 122.901,128.95 ccw(c122.901,130.999) 124.35,129.55 ccw(c123.565,130.335) 124.675,130.335 124.675,160.723 ccw(c122.135,160.723) 123.931,162.519 123.5,162.75 cw(c123.259,163.333) 123.017,162.75 91.775,162.75 ccw(c91.775,162.328) 91.476,162.626 90.75,161.9 90.75,144.133 cw(c90.067,144.133) 90.55,143.65
GND on L2(GND) "GND_L02_P008" (solid, pour order 8): 79.525,66.375 79.525,53.902 ccw(c82.065,53.902) 80.269,52.106 80.3,52.075 ccw(c80.904,52.679) 80.904,51.825 111.726,51.825 ccw(c111.726,53.874) 113.175,52.425 ccw(c112.39,53.21) 113.5,53.21 113.5,83.598 ccw(c110.96,83.598) 112.756,85.394 112.325,85.625 cw(c112.084,86.208) 111.842,85.625 80.6,85.625 ccw(c80.6,85.203) 80.301,85.501 79.575,84.775 79.575,67.008 cw(c78.892,67.008) 79.375,66.525

## Silkscreen, mask and mechanical layers (free items; w line width, h text height)
Top Overlay:
  text "MPU_6050" at 83.643,84.617 h1
  text "SWD" at 96.351,81.25 h1.2
  text "SWD" at 96.348,81.241 h1.2
  text "MCU" at 98.3,70.325 h1.2
  text "USB" at 109.8,66.3 h1.2
  text "GPIO" at 92.7,58.65 h1.2
  text "REG" at 100.904,54.354 h1.3
Mechanical 1:
  lines w0.254: 79,53.254 ccw(c81.254,53.254) 81.254,51 111.828,51 ccw(c111.828,53.172) 114,53.172 114,84.118 ccw(c112.118,84.118) 112.118,86 86,86 80.28,86 ccw(c80.28,84.72) 79,84.72 79,63 79,53.254

## Text inside footprints (layer, text, board x,y; h text height)
D1: Mechanical 13 "+" at 109.492,57.942 h0.5 r90
D2: Mechanical 13 "+" at 97.617,69.508 h0.5